# Altium PCB PCB1.PcbDoc
Units mil, origin at the board's own origin, x right, y up, seen from the top; angles counter-clockwise.
Board outline 3500 x 2000 mil, 2 copper layers (Top Layer, Bottom Layer); 49 components, 33 nets, 160 pads, 21 vias.
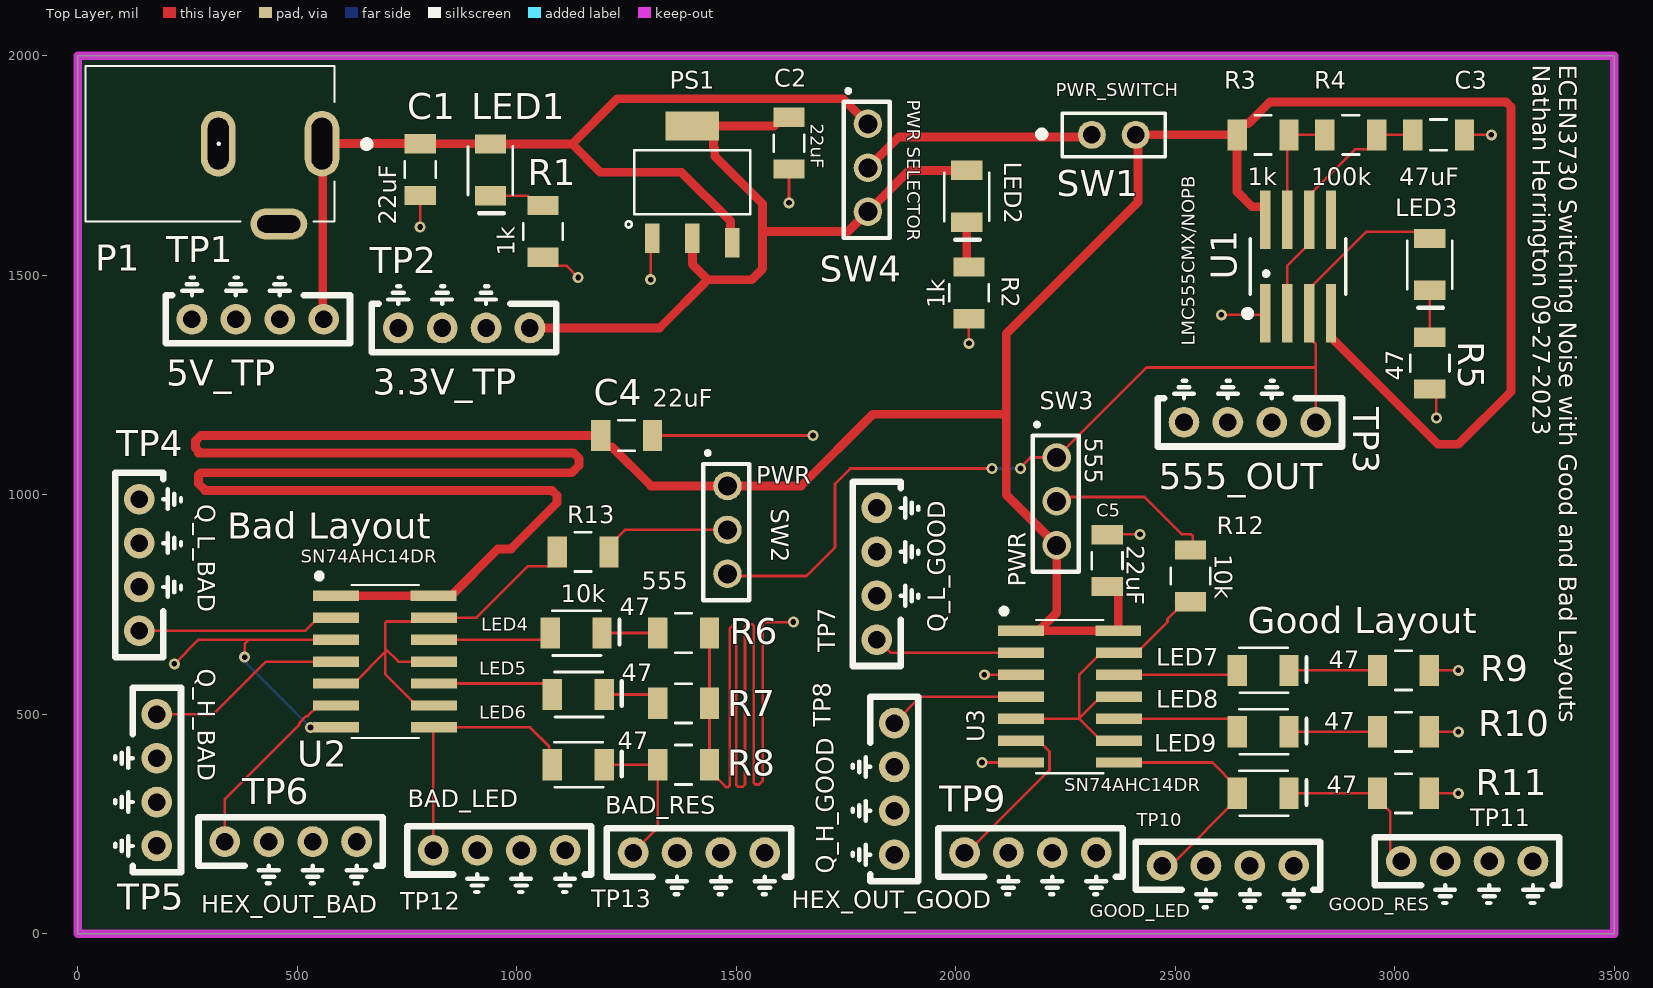
[diagram p0: Top Layer view]
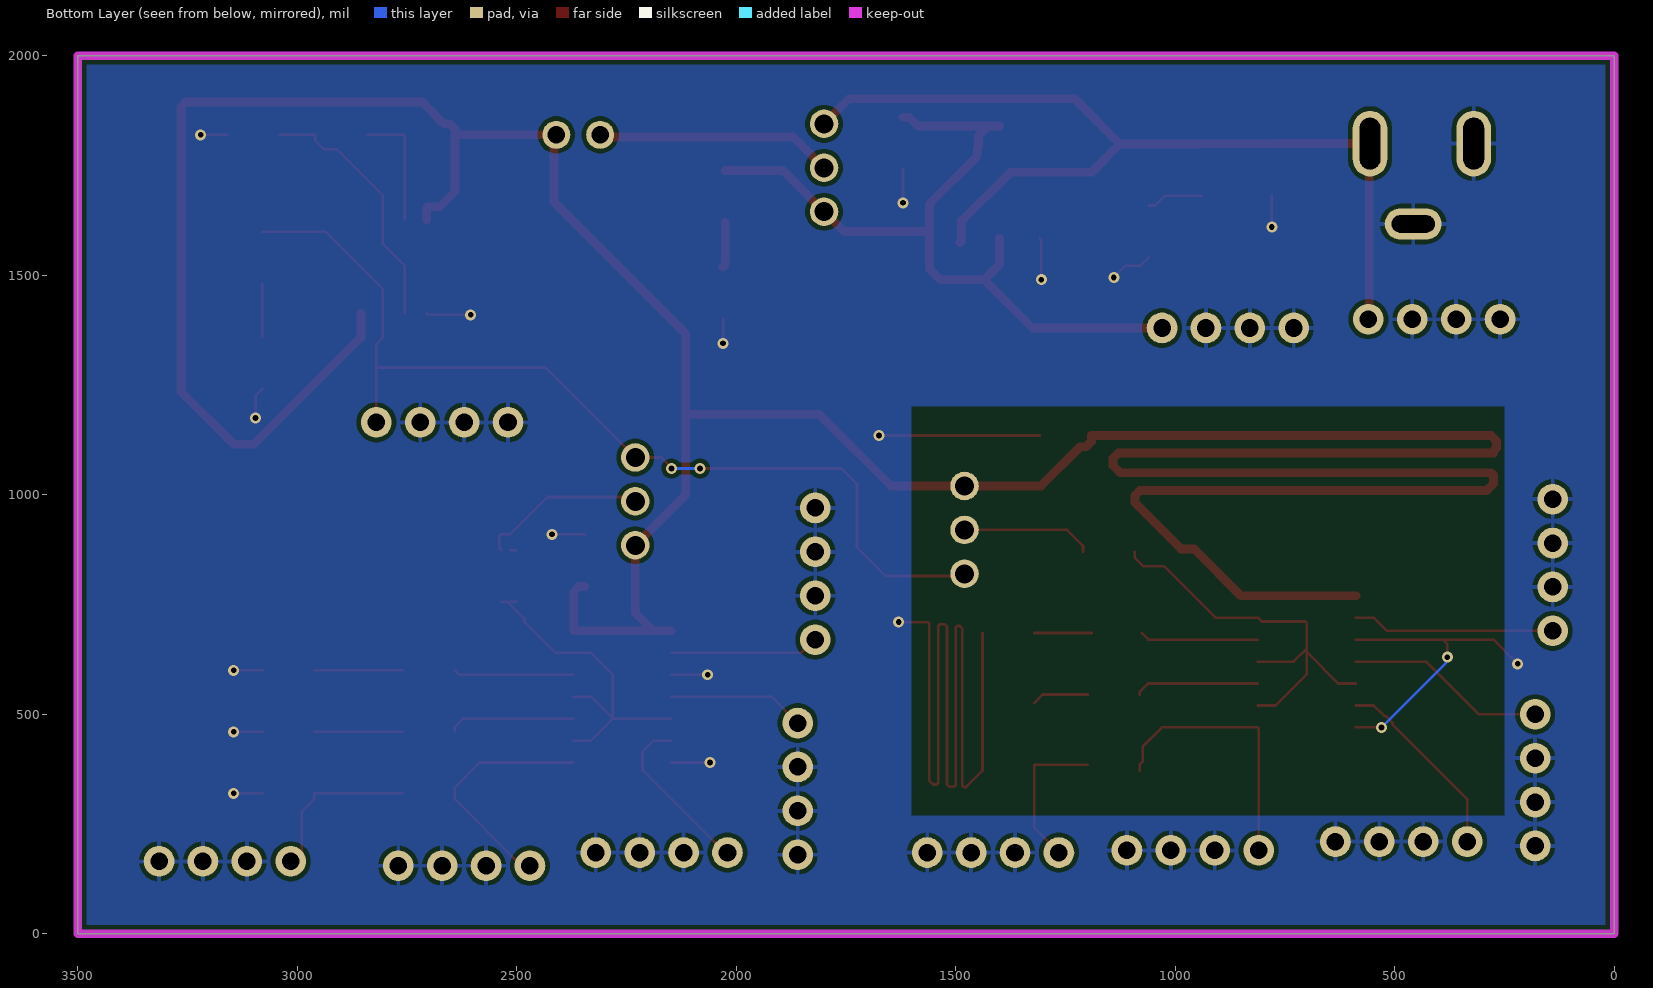
[diagram p1: Bottom Layer view, seen from below]
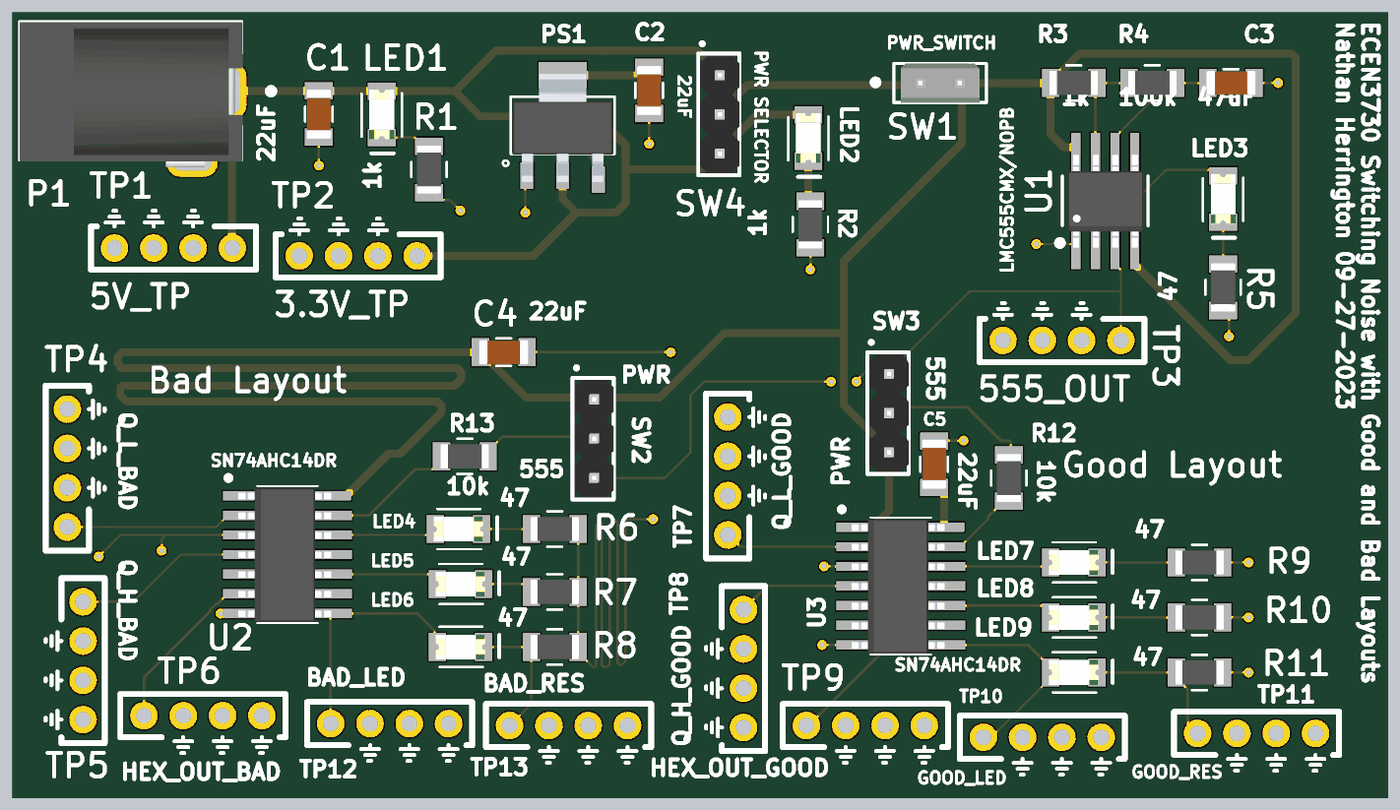
[diagram p2: 3D render of the assembled board from above, using the file's embedded part models]

## Layer stack, top to bottom
Top Solder: solder mask 0.4, Solder Resist, Dk 3.5
Top Layer: signal copper 1.4
Dielectric 1: dielectric 12.6, FR-4, Dk 4.8
Bottom Layer: signal copper 1.4
Bottom Solder: solder mask 0.4, Solder Resist, Dk 3.5

## Board outline
0,0 3500,0 3500,2000 0,2000

## Design rules (kind name [scope] priority, off if disabled: settings)
BoardOutlineClearance [All] p1: gap=10 ignorepadtopadclearanceinfootprint=FALSE except(0: Arc-SplitContinuation Track-SplitContinuation SMDPad-SplitContinuation THPad-SplitContinuation Via-SplitContinuation Fill-SplitContinuation Poly-SplitContinuation Region-SplitContinuation Text-SplitContinuation)
Clearance [All] p1: gap=10 ignorepadtopadclearanceinfootprint=FALSE except(0: Arc-Hole Track-Hole SMDPad-Hole THPad-Hole Via-Hole Fill-Hole Poly-Hole Region-Hole Text-Hole)
PlaneClearance [All] p1: clearance=10
PlaneConnect [All] p1: planeconnectstyle=Direct reliefexpansion=20 reliefentries=4 reliefconductorwidth=10 reliefairgap=10
PolygonConnect [All] p1: thpad.connectstyle=Relief thpad.reliefconductorwidth=10 thpad.reliefentries=4 thpad.polygonreliefangle="90 Angle" thpad.airgapwidth=10 smdpad.connectstyle=Direct smdpad.reliefconductorwidth=10 smdpad.reliefentries=4 smdpad.polygonreliefangle="90 Angle" smdpad.airgapwidth=10 via.connectstyle=Direct via.reliefconductorwidth=10 via.reliefentries=4 via.polygonreliefangle="90 Angle" via.airgapwidth=10
RoutingVias [All] p1: holewidth=13 width=25 viastyle="Through Hole" minholewidth=13 minwidth=25 maxholewidth=60 maxwidth=80
SolderMaskExpansion [All] p1: expansion=4 istentingtop=FALSE
UnRoutedNet [All] p1: checkbadconnections=TRUE
Width "Schematic Width Constraint_1" [InNet('+5')] p1: maxlimit=100 minlimit=10 preferedwidth=20 minimp=50.000000 maximp=50.000000 favimp=50.000000
Width "Schematic Width Constraint" [InNet('NetC4_1')] p2: maxlimit=100 minlimit=10 preferedwidth=20 minimp=50.000000 maximp=50.000000 favimp=50.000000
Width [All] p3: maxlimit=100 minlimit=6 preferedwidth=6 minimp=50.000000 maximp=50.000000 favimp=50.000000
27 further rules are at their usual default settings.

## Components (designator, comment, footprint, x,y, rotation, side; value= is the part's Value field where it differs from the comment)
C1 "22uF" 1206_Passive_Capacitor 780,1741 r90 top
C2 "22uF" 1206_Passive_Capacitor 1620,1801 r90 top
C3 "47nF" 1206_Passive_Capacitor 3100,1820 r180 top
C4 "22uF" 1206_Passive_Capacitor 1250,1135 r0 top
C5 "22uF" 1206_Passive_Capacitor 2345,850 r270 top
LED1 "Red" LED_1206 940,1740 r270 top
LED2 "Red" LED_1206 2025,1680 r270 top
LED3 "Red" LED_1206 3080,1525 r270 top
LED4 "Red" LED_1206 1135,685 r0 top
LED5 "Red" LED_1206 1140,545 r0 top
LED6 "Red" LED_1206 1140,385 r0 top
LED7 "Red" LED_1206 2700,600 r0 top
LED8 "Red" LED_1206 2700,460 r0 top
LED9 "Red" LED_1206 2700,320 r0 top
P1 "Power Jack" Power_Jack 556.22,1800 r180 top value="CONN PWR JACK 2X5.5MM SOLDER"
PS1 "AMS1117-3.3" LDO 1400,1712.05 r0 top value="IC REG LINEAR 3.3V 800MA SOT223"
R1 "1k" 1206_Passive_Resitor 1060,1600 r90 top value="1K Ohm"
R2 "1k" 1206_Passive_Resitor 2030,1460 r90 top value="1K Ohm"
R3 "1k" 1206_Passive_Resitor 2700,1820 r180 top value="1K Ohm"
R4 "100KOhm" 1206_Passive_Resitor 2900,1820 r180 top
R5 "47 Ohms" 1206_Passive_Resitor 3080,1300 r270 top value=47Ohm
R6 "47 Ohms" 1206_Passive_Resitor 1380,685 r0 top value=47Ohm
R7 "47 Ohms" 1206_Passive_Resitor 1380,525 r0 top value=47Ohm
R8 "47 Ohms" 1206_Passive_Resitor 1380,385 r0 top value=47Ohm
R9 "47 Ohms" 1206_Passive_Resitor 3020,600 r0 top value=47Ohm
R10 "47 Ohms" 1206_Passive_Resitor 3020,460 r0 top value=47Ohm
R11 "47 Ohms" 1206_Passive_Resitor 3020,320 r0 top value=47Ohm
R12 "10k" 1206_Passive_Resitor 2535,815 r270 top value=10KOhm
R13 "10k" 1206_Passive_Resitor 1151,870 r180 top value=10KOhm
SW1 "PWR_SWITCH" 2Pin-Header-Conn 2310,1820 r0 top
SW2 "PREC003SAAN-RC" 3_PIN_100mil 1480,1020 r270 top value="CONN HEADER VERT 3POS 2.54MM"
SW3 "PREC003SAAN-RC" 3_PIN_100mil 2230,1085 r270 top value="CONN HEADER VERT 3POS 2.54MM"
SW4 "PWR SELECTOR" 3_PIN_100mil 1800,1845 r270 top value="CONN HEADER VERT 3POS 2.54MM"
TP1 "5V_TP" TP10x_Probe 410,1400 r180 top
TP2 "3.3V_TP" TP10x_Probe 880,1380 r180 top
TP3 "555_OUT" TP10x_Probe 2670,1165 r180 top
TP4 "Q_L_BAD" TP10x_Probe 140,840 r90 top
TP5 "Q_H_BAD" TP10x_Probe 180,350 r270 top
TP6 "HEX_OUT_BAD" TP10x_Probe 485,210 r0 top
TP7 "Q_L_GOOD" TP10x_Probe 1820,820 r90 top
TP8 "Q_H_GOOD" TP10x_Probe 1860,330 r270 top
TP9 "HEX_OUT_GOOD" TP10x_Probe 2170,185 r0 top
TP10 "GOOD_LED" TP10x_Probe 2620,155 r0 top
TP11 "GOOD_RES" TP10x_Probe 3165,165 r0 top
TP12 "BAD_LED" TP10x_Probe 960,190 r0 top
TP13 "BAD_RES" TP10x_Probe 1415,185 r0 top
U1 "LMC555CMX/NOPB" TS555IDTTR 2780,1520 r90 top
U2 "SN74AHC14DR" HEX_74AC14 700,620 r0 top
U3 "SN74AHC14DR" HEX_74AC14 2260,540 r0 top

## Footprints (in the part's own frame and the unit in brackets; to place one, negate y for a bottom-side part, rotate by r counter-clockwise, add the part's x,y. Pads: shape width x height; smd on the part's side, far side on the other; paste and mask are expansions set on the pad)
2Pin-Header-Conn [mm]
  round 1.62 hole 1.02: 1(0,0) 2(2.54,0)
  silkscreen extent -3.02,-1.27 4.26,1.26, body extent -1.27,-1.27 3.81,1.27, height 8.13
3_PIN_100mil [mm]
  round 1.65 hole 1.1: 1(0,0) 2(2.54,0) 3(5.08,0)
  silkscreen extent -2,-1.4 6.6,1.27, body extent -1.14,-1.27 6.48,1.27, height 8.38
1206_Passive_Capacitor [mil]
  rect 44x71 smd: 1(-59,0) 2(59,0)
  silkscreen extent -19,-35 19,35, body extent -63,-31 63,32, height 50
1206_Passive_Resitor [mil]
  rect 44x71 smd: 1(-59,0) 2(59,0)
  silkscreen extent -19,-45 19,45, body extent -61,-31 61,31, height 26
HEX_74AC14 [mm]
  rect 2.65x0.6 smd: 1(-2.836,3.81) 2(-2.836,2.54) 3(-2.836,1.27) 4(-2.836,0) 5(-2.836,-1.27) 6(-2.836,-2.54) 7(-2.836,-3.81) 8(2.836,-3.81) 9(2.836,-2.54) 10(2.836,-1.27) 11(2.836,0) 12(2.836,1.27) 13(2.836,2.54) 14(2.794,3.81)
  silkscreen extent -3.94,-4.43 1.95,5.08, body extent -3.18,-4.35 2.82,4.3, height 1.75
LDO [mm]
  rect 0.838x1.7 smd: 1(-2.311,-3.25) 2(0,-3.25) 3(2.311,-3.5)
  rect 3.099x1.7 smd: 4(0,3.25)
  silkscreen extent -3.86,-2.62 3.35,1.85, body extent -3.25,-3.65 3.25,3.35, height 1.85
LED_1206 [mil]
  rect 44x71 smd: 1(-59,0) 2(59,0)
  silkscreen extent -54,-51 99,51, body extent -63,-31 63,31, height 28
Power_Jack [mm]
  oval 2x3.8 hole 1.2 slot 3 at 90 deg: 1(0,0) 2(6,0)
  oval 3.3x1.8 hole 1 slot 2.5 at 0 deg: 3(2.5,4.65)
  silkscreen extent -2.79,-4.5 13.68,4.5, body extent -0.76,-4.45 13.64,4.95, height 11.49
TP10x_Probe [mil] "Small Probs footprint"
  round 70 hole 40: 1(-150,0) 2(-50,0) 2(50,0) 2(150,0)
  silkscreen extent -210,-95 210,55
TS555IDTTR [mm] "IC OSC Single Timer 2.7MHz 8SOIC"
  rect 3.4x0.6 smd: 1(-2.7,1.905) 2(-2.7,0.635) 3(-2.7,-0.635) 4(-2.7,-1.905) 5(2.7,-1.905) 6(2.7,-0.635) 7(2.7,0.635) 8(2.7,1.905)
  silkscreen extent -2.85,-2.77 1.6,3.05, body extent -3.03,-2.48 2.96,2.43, height 1.75

## Part data
C1 C2 C4 C5: library part C_22uF_1206, "22uF ±10% 25V X5R 1206 Multilayer Ceramic Capacitors MLCC - SMD/SMT RoHS", LCSC Part#=C12891, MFR Part #=CL31A226KAHNNNE, Datasheet=https://datasheet.lcsc.com/lcsc/1811031514_Samsung-Electro-Mechanics-CL31A226KAHNNNE_C12891.pdf, Type=basic
C3: library part C_47nF_1206, "47nF ±5% 50V C0G 1206 Multilayer Ceramic Capacitors MLCC - SMD/SMT RoHS", LCSC Part#=C21812, MFR Part #=GRM31M5C1H473JA01L, Datasheet=https://datasheet.lcsc.com/lcsc/1810201313_Murata-Electronics-GRM31M5C1H473JA01L_C21812.pdf, Type=Extended
LED1 LED2 LED3 LED4 LED5 LED6 LED7 LED8 LED9: library part LED_RED_1206, "Red 621~631nm 1206 Light Emitting Diodes (LED) RoHS", LCSC Part#=C93133, MFR Part #=15-21/R6C-FQ1R1B/2T, Datasheet=https://datasheet.lcsc.com/szlcsc/1811151241_Everlight-Elec-15-21-R6C-FQ1R1B-2T_C93133.pdf, Type=Extended
P1: library part "P_Power Jack", "Power Barrel Connector Jack 2.10mm ID (0.083\"), 5.50mm OD (0.217\") Through Hole, Right Angle", LCSC Part#=C136744, MFR Part #=PJ-102A, Digikey Link=https://www.digikey.com/product-detail/en/PJ-102A/CP-102A-ND/275425/?itemSeq=304982367, Type=Extended
PS1: library part PS_AMS_LDO_3v3, "LOW DROPOUT REGULATORS(LDO) POSITIVE FIXED 1.3V @ 800MA 15V 3.3V 1A SOT-223 ROHS", LCSC Part#=C6186, MFR Part #=AMS1117-3.3, Type=Basic
R1 R2 R3: library part R_1K_1206, "CHIP RESISTOR - SURFACE MOUNT 1KOHMS ±1% 1/4W 1206 ROHS", LCSC Part#=C4410, MFR Part #=RNCP1206FTD1K00CT, Digikey Link=https://www.digikey.com/product-detail/en/RNCP1206FTD1K00/RNCP1206FTD1K00CT-ND/2240675/?itemSeq=304982373, Type=Basic
R4: library part R_100KOhm_1206, "100kΩ ±1% 0.25W ±100ppm/℃ 1206 Chip Resistor - Surface Mount RoHS", LCSC Part#=C17900, MFR Part #=1206W4F1003T5E, Datasheet=https://datasheet.lcsc.com/lcsc/1810301421_UNI-ROYAL-Uniroyal-Elec-1206W4F1003T5E_C17900.pdf, Type=Basic
R5 R6 R7 R8 R9 R10 R11: library part R_47Ohm_1206, "47Ω ±5% 0.25W ±200ppm/℃ 1206 Chip Resistor - Surface Mount RoHS", LCSC Part#=C25384, MFR Part #=1206W4J0470T5E, Datasheet=https://datasheet.lcsc.com/lcsc/1811101020_UNI-ROYAL-Uniroyal-Elec-1206W4J0470T5E_C25384.pdf, Type=Extended
R12 R13: library part R_10KOhm_1206, "10 kOhms ±5% 0.25W, 1/4W Chip Resistor 1206 (3216 Metric) Automotive AEC-Q200 Thick Film", LCSC Part#=C17902, MFR Part #=RMCF1206FT10K0, Digikey Link=https://www.digikey.com/en/products/detail/stackpole-electronics-inc/RMCF1206FT10K0/1759669, Type=Basic
SW1: library part SW_2Pin_100mil_Switch, "2Pin Header", LCSC Part#=C124375, Type=Extended
SW2 SW3: library part SW_3Pin_100mil_Switch, "Connector Header Through Hole 3 position 0.100\" (2.54mm)", LCSC Part#=C49257, Digikey Link=https://www.digikey.com/product-detail/en/PREC003SAAN-RC/S1012EC-03-ND/2774851/?itemSeq=304982371, MFR Part #=PREC003SAAN-RC, Type=Extended
SW4: library part SW_3Pin_100mil_Switch, "Connector Header Through Hole 3 position 0.100\" (2.54mm)", LCSC Part#=C49257, MFR Part #=PREC003SAAN-RC, Digikey Link=https://www.digikey.com/product-detail/en/PREC003SAAN-RC/S1012EC-03-ND/2774851/?itemSeq=304982371, Type=Extended
TP1 TP2 TP3 TP4 TP5 TP6 TP7 TP8 TP9 TP10 TP11 TP12 TP13: library part TP_10x_Probe, "Test Point 300 mil centers"
U1: library part U_555_Fast, "555 Type, Timer/Oscillator _Single_ IC 3MHz 8-SO", LCSC Part#=C90760, Package=SOIC-8, Digikey Link=https://www.digikey.com/product-detail/en/texas-instruments/LMC555CMX-NOPB/LMC555CMX-NOPBCT-ND/1010550, MFR Part #=LMC555CMX/NOPB, Type=Extended
U2 U3: library part U_74AHC14, "Inverter IC 6 Channel Schmitt Trigger 14-SOIC", LCSC Part#=C6942, Datasheet=https://datasheet.lcsc.com/szlcsc/ON-Semicon-ON-74AC14SCX_C5482.pdf, MFR Part #=SN74AHC14DR, Type=Extended

## Via types
v1: diameter 25, hole 13, Top Layer to Bottom Layer, 21 vias

## Nets (pads, with @x,y where several pads share a name; then routed paths per layer and width w, separated by ;. In a path a pad name is that pad's centre, name@x,y a point inside that pad or via, vN(x,y) a via of type N, cw(c..) or ccw(c..) an arc to the next point about the centre after c; other vN are vias at no path point)
+5: C1.2 LED1.1 P1.1 PS1.3 SW4.1 TP1.1 | length 2196.3
  Top Layer w20: TP1.1 558.11,1401.89 558.11,1798.11 P1.1 C1.2 780.5,1799.5 939.5,1799.5 LED1.1 1126,1799 ; PS1.3 1487.18,1578.07 1487.18,1622.82 1375,1735 1190,1735 1126,1799 ; SW4.1 1743,1902 1229,1902 1126,1799
BadInverterInput: R13.2 U2.5 U2.9 U2.11 U2.13 | length 990
  Top Layer w6: U2.5 628.7,570 700,641.3 ; U2.9 771.3,520 700,591.3 700,641.3 ; U2.11 730,620 700,650 ; R13.2 1092,856.5 1073,837.5 1025.66,837.5 908.16,720 U2.13 802.84,711.19 703.51,711.19 700,707.67 700,650 ; 700,641.3 700,650
GND: C1.1 C2.1 C3.1 C4.2 C5.1 P1.2 P1.3 PS1.1 R1.1 R2.1 R5.2 R6.2 R7.2 R8.2 R9.2 R10.2 R11.2 TP1.2 TP2.2 TP3.2 TP4.2 TP5.2 TP6.2 TP7.2 TP8.2 TP9.2 TP10.2 TP11.2 TP12.2 TP13.2 U1.1 U2.3 U2.7 U3.3 U3.7 | length 4493.5
  Top Layer w6: v1(220,615) 275,670 390,670 ; v1(380,630) 380,660 390,670 ; v1(530,470) U2.7 ; U2.3 390,670 ; v1(780,1610) C1.1 ; R1.1 1079,1522 1113,1522 v1(1140,1495) ; v1(1305,1490) 1305,1580.09 PS1.1 ; C4.2 v1(1675,1135) ; R6.2 R7.2 R8.2 1439,371.5 1476.51,333.99 1481.49,333.99 1485,337.5 1485,695 1491.51,701.51 1496.49,701.51 1500,698 1500,338.51 1503.51,335 1515,335 1520,340 1520,700 1525,705 1536.49,705 1540,701.49 1540,343.51 1543.51,340 1551.49,340 1560,348.51 1560,706.49 1563.51,710 v1(1630,710) ; v1(1620,1665) C2.1 ; v1(2030,1345) R2.1 ; v1(2060,390) U3.7 ; v1(2065,590) U3.3 ; C5.1 2346,910 v1(2420,910) ; v1(2605,1410) 2701.3,1410 U1.1 ; R11.2 v1(3145,320) ; R10.2 v1(3145,460) ; R9.2 v1(3145,600) ; R5.2 3095,1226 v1(3095,1175) ; C3.1 v1(3220,1820)
  Bottom Layer w6: v1(380,630) 383.64,626.36 383.64,616.36 v1(530,470)
GoodInverterInput: R12.2 U3.5 U3.9 U3.11 U3.13 | length 794.9
  Top Layer w6: U3.5 2281.3,490 ; U3.9 2331.3,440 2281.3,490 ; U3.11 2331.3,540 2281.3,490 ; R12.2@2501.5,756 R12.2@2515,756 ; R12.2 2521.5,756 2482.5,717 2482.5,710.49 2412.01,640 U3.13 2331.3,640 2281.3,590 2281.3,490
NetC2_2: C2.2 LED2.1 PS1.2 PS1.4 SW4.3 TP2.1 | length 1826.3
  Top Layer w20: TP2.1 1325,1380 1435,1490 ; PS1.2 1400,1525 1435,1490 ; PS1.4 PS1.4@1424.98,1840 ; C2.2 1606.5,1860 1586.5,1840 PS1.4@1424.98,1840 ; LED2.1 1894,1739 SW4.3 1755,1600 1560,1600 ; PS1.4@1424.98,1840 1448.45,1816.54 1448.45,1791.55 1451,1789 1451,1771.43 1560,1662.43 1560,1600 ; 1435,1490 1535,1490 1560,1515 1560,1600
NetC3_2: C3.2 R4.1 U1.2 U1.6 | length 589.7
  Top Layer w6: U1.2 2755,1521.18 2805,1571.18 U1.6 2805,1681.42 2911.08,1787.5 2940,1787.5 2959,1806.5 R4.1 C3.2
NetC4_1: C4.1 C5.2 R3.2 SW1.2 SW2.1 SW3.3 U1.4 U1.8 U2.1 U2.14 U3.1 U3.14 | length 9284.3
  Top Layer w20: U2.1 U2.14 850.35,770 957.12,876.76 986.76,876.76 1091.72,981.72 1091.72,998.28 1080,1010 290,1010 275,1025 275,1045 280,1050 1125,1050 1141.72,1066.72 1141.72,1083.28 1130,1095 275,1095 275,1100 268.28,1106.72 268.28,1123.28 280,1135 C4.1 1191,1121.5 1203,1109.5 1216.5,1109.5 1306,1020 SW2.1 1647.47,1020 1810.76,1183.29 2115,1183.29 ; U3.1 U3.1@2188.7,690 ; C5.2 2358,791 2370,779 U3.14 U3.1@2188.7,690 ; SW1.2 SW1.2@2415,1820 ; U1.8 2705,1654.58 2703.19,1656.39 2674.9,1656.39 2641,1690.3 R3.2 ; U1.4 2855,1358.58 3098.58,1115 3145,1115 3265,1235 3265,1883.28 3253.28,1895 2716,1895 2666.5,1845.5 2653,1845.5 2641,1833.5 R3.2 ; 2115,1183.29 2115,1366.58 2415,1666.58 SW1.2@2415,1820 ; 2115,1183.29 2115,1000 SW3.3 2230,731.3 U3.1@2188.7,690 ; SW1.2@2415,1820 R3.2
NetLED1_2: LED1.2 R1.2 | length 129.1
  Top Layer w6: LED1.2 1024.5,1681 1046.5,1659 R1.2
NetLED2_2: LED2.2 R2.2 | length 104.1
  Top Layer w20: LED2.2 2025,1524 R2.2
NetLED3_1: LED3.1 SW2.3 SW3.1 TP3.1 U1.3 | length 2264.2
  Top Layer w6: SW2.3 1485,815 1660,815 1725,880 1725,1025 1760,1060 v1(2082.5,1060) ; v1(2147.5,1060) 2147.5,1062.5 2170,1085 SW3.1 2435,1290 2820,1290 ; TP3.1 2820,1290 ; LED3.1@3080,1599 2935.18,1599 2805,1468.82 U1.3 2805,1358.58 2820,1343.58 2820,1290
  Bottom Layer w6: v1(2082.5,1060) v1(2147.5,1060)
NetLED3_2: LED3.2 R5.1 | length 122
  Top Layer w6: R5.1 LED3.2@3080,1481
NetLED4_1: LED4.1 U2.12 | length 270.6
  Top Layer w6: U2.12 1061,670 LED4.1
NetLED4_2: LED4.2 R6.1 | length 131
  Top Layer w6: LED4.2@1190,685 LED4.2 R6.1
NetLED5_1: LED5.1 U2.10 | length 283.2
  Top Layer w6: U2.10 1062,570 1081,551 LED5.1
NetLED5_2: LED5.2 R7.1 | length 130.9
  Top Layer w6: LED5.2 1302,545 1321,526 R7.1
NetLED6_1: LED6.1 TP12.1 U2.8 | length 618.7
  Top Layer w6: TP12.1 810,468.35 U2.8 1030,470 1074.01,425.99 1074.01,391.99 LED6.1 LED6.1@1081,371.5
NetLED6_2: LED6.2 R8.1 TP13.1 | length 345.2
  Top Layer w6: LED6.2 R8.1 1321,241 TP13.1
NetLED7_1: LED7.1 U3.12 | length 273.5
  Top Layer w6: U3.12 2631,590 LED7.1
NetLED7_2: LED7.2 R9.1 | length 202
  Top Layer w6: LED7.2 R9.1
NetLED8_1: LED8.1 U3.10 | length 288.2
  Top Layer w6: U3.10 2622,490 2641,471 LED8.1
NetLED8_2: LED8.2 R10.1 | length 202
  Top Layer w6: LED8.2 R10.1
NetLED9_1: LED9.1 TP10.1 U3.8 | length 553.5
  Top Layer w6: U3.8 2584.5,390 2641,333.5 LED9.1 2641,306.5 2501.75,167.25 2482.25,167.25 TP10.1
NetLED9_2: LED9.2 R11.1 TP11.1 | length 364
  Top Layer w6: LED9.2 R11.1 2961,306.5 2990,277.5 TP11.1@2990,170
NetR3_1: R3.1 R4.2 U1.7 | length 277.4
  Top Layer w6: U1.7 2755,1816 R3.1 R4.2
NetR12_1: R12.1 SW3.2 | length 398.9
  Top Layer w6: SW3.2 2240,995 2430,995 2515,910 2536.49,910 2540,906.49 2540,879 R12.1 ; R12.1@2501.5,874 R12.1@2515,874
NetR13_1: R13.1 SW2.2 | length 298.6
  Top Layer w6: R13.1 1210,883.5 1246.5,920 SW2.2
NetSW1_1: SW1.1 SW4.2 | length 541.1
  Top Layer w20: SW4.2 1870,1815 2305,1815 SW1.1
NetTP4_1: TP4.1 U2.2 | length 460.8
  Top Layer w6: TP4.1 517.99,690 547.99,720 U2.2
NetTP5_1: TP5.1 U2.4 | length 458.1
  Top Layer w6: TP5.1 308.25,500 428.25,620 U2.4
NetTP6_1: TP6.1 U2.6 | length 441
  Top Layer w6: TP6.1 335,307.01 504.5,476.51 504.5,480.56 519.44,495.5 523.49,495.5 547.99,520 U2.6
NetTP7_1: TP7.1 U3.2 | length 340.8
  Top Layer w6: TP7.1 1822.23,670 1852.23,640 U3.2
NetTP8_1: TP8.1 U3.4 | length 313.2
  Top Layer w6: TP8.1 1920,540 U3.4
NetTP9_1: TP9.1 U3.6 | length 389.1
  Top Layer w6: TP9.1 2025.71,185 2213.51,372.8 2213.51,415.19 2188.7,440 U3.6
pads on no net: U1.5

## Polygon pours and split planes (outlines as drawn)
GND on Bottom Layer "GND_L02_P000" (solid, pour order 0): 0,2000 3500,2000 3500,0 0,0

## Keep-outs
Keep-Out Layer:
  the board outline again, w20

## Other copper
Bottom Layer:
  pour cut-out: 250,1200 1600,1200 1600,270 250,270

## Silkscreen, mask and mechanical layers (free items; w line width, h text height)
Top Overlay:
  text "ECEN3730 Switching Noise with Good and Bad Layouts  / Nathan Herrington 09-27-2023" at 3315,1980 h40 r270
  text "22uF" at 1670,1845 h30 r270
  text "1k" at 2665,1705 h40
  text "100k" at 2810,1705 h40
  text "47uF" at 3010,1705 h40
  text "22uF" at 725,1615 h40 r90
  text "1k" at 995,1545 h40 r90
  text "1k" at 1975,1425 h40 r90
  text "47" at 3020,1260 h40 r90
  text "22uF" at 1310,1200 h40
  text "555" at 2295,1130 h40 r270
  text "PWR" at 1545,1025 h40
  text "Bad Layout" at 340,900 h60
  text "22uF" at 2390,885 h40 r270
  text "10k" at 2590,865 h40 r270
  text "PWR" at 2160,790 h40 r90
  text "555" at 1285,785 h40
  text "10k" at 1100,755 h40
  text "47" at 1235,725 h40
  text "Good Layout" at 2665,685 h60
  text "47" at 2850,605 h40
  text "47" at 1239,575 h40
  text "47" at 2840,465 h40
  text "47" at 1230,420 h40
  text "47" at 2845,320 h40